# Altium PCB PCB1.PcbDoc (part 10 of 12)
Units mm, origin at the board's own origin, x right, y up, seen from the top; angles counter-clockwise.
Board outline 122.17 x 121.67 mm, 2 copper layers (Top Layer, Bottom Layer); 274 components, 225 nets, 941 pads, 421 vias.
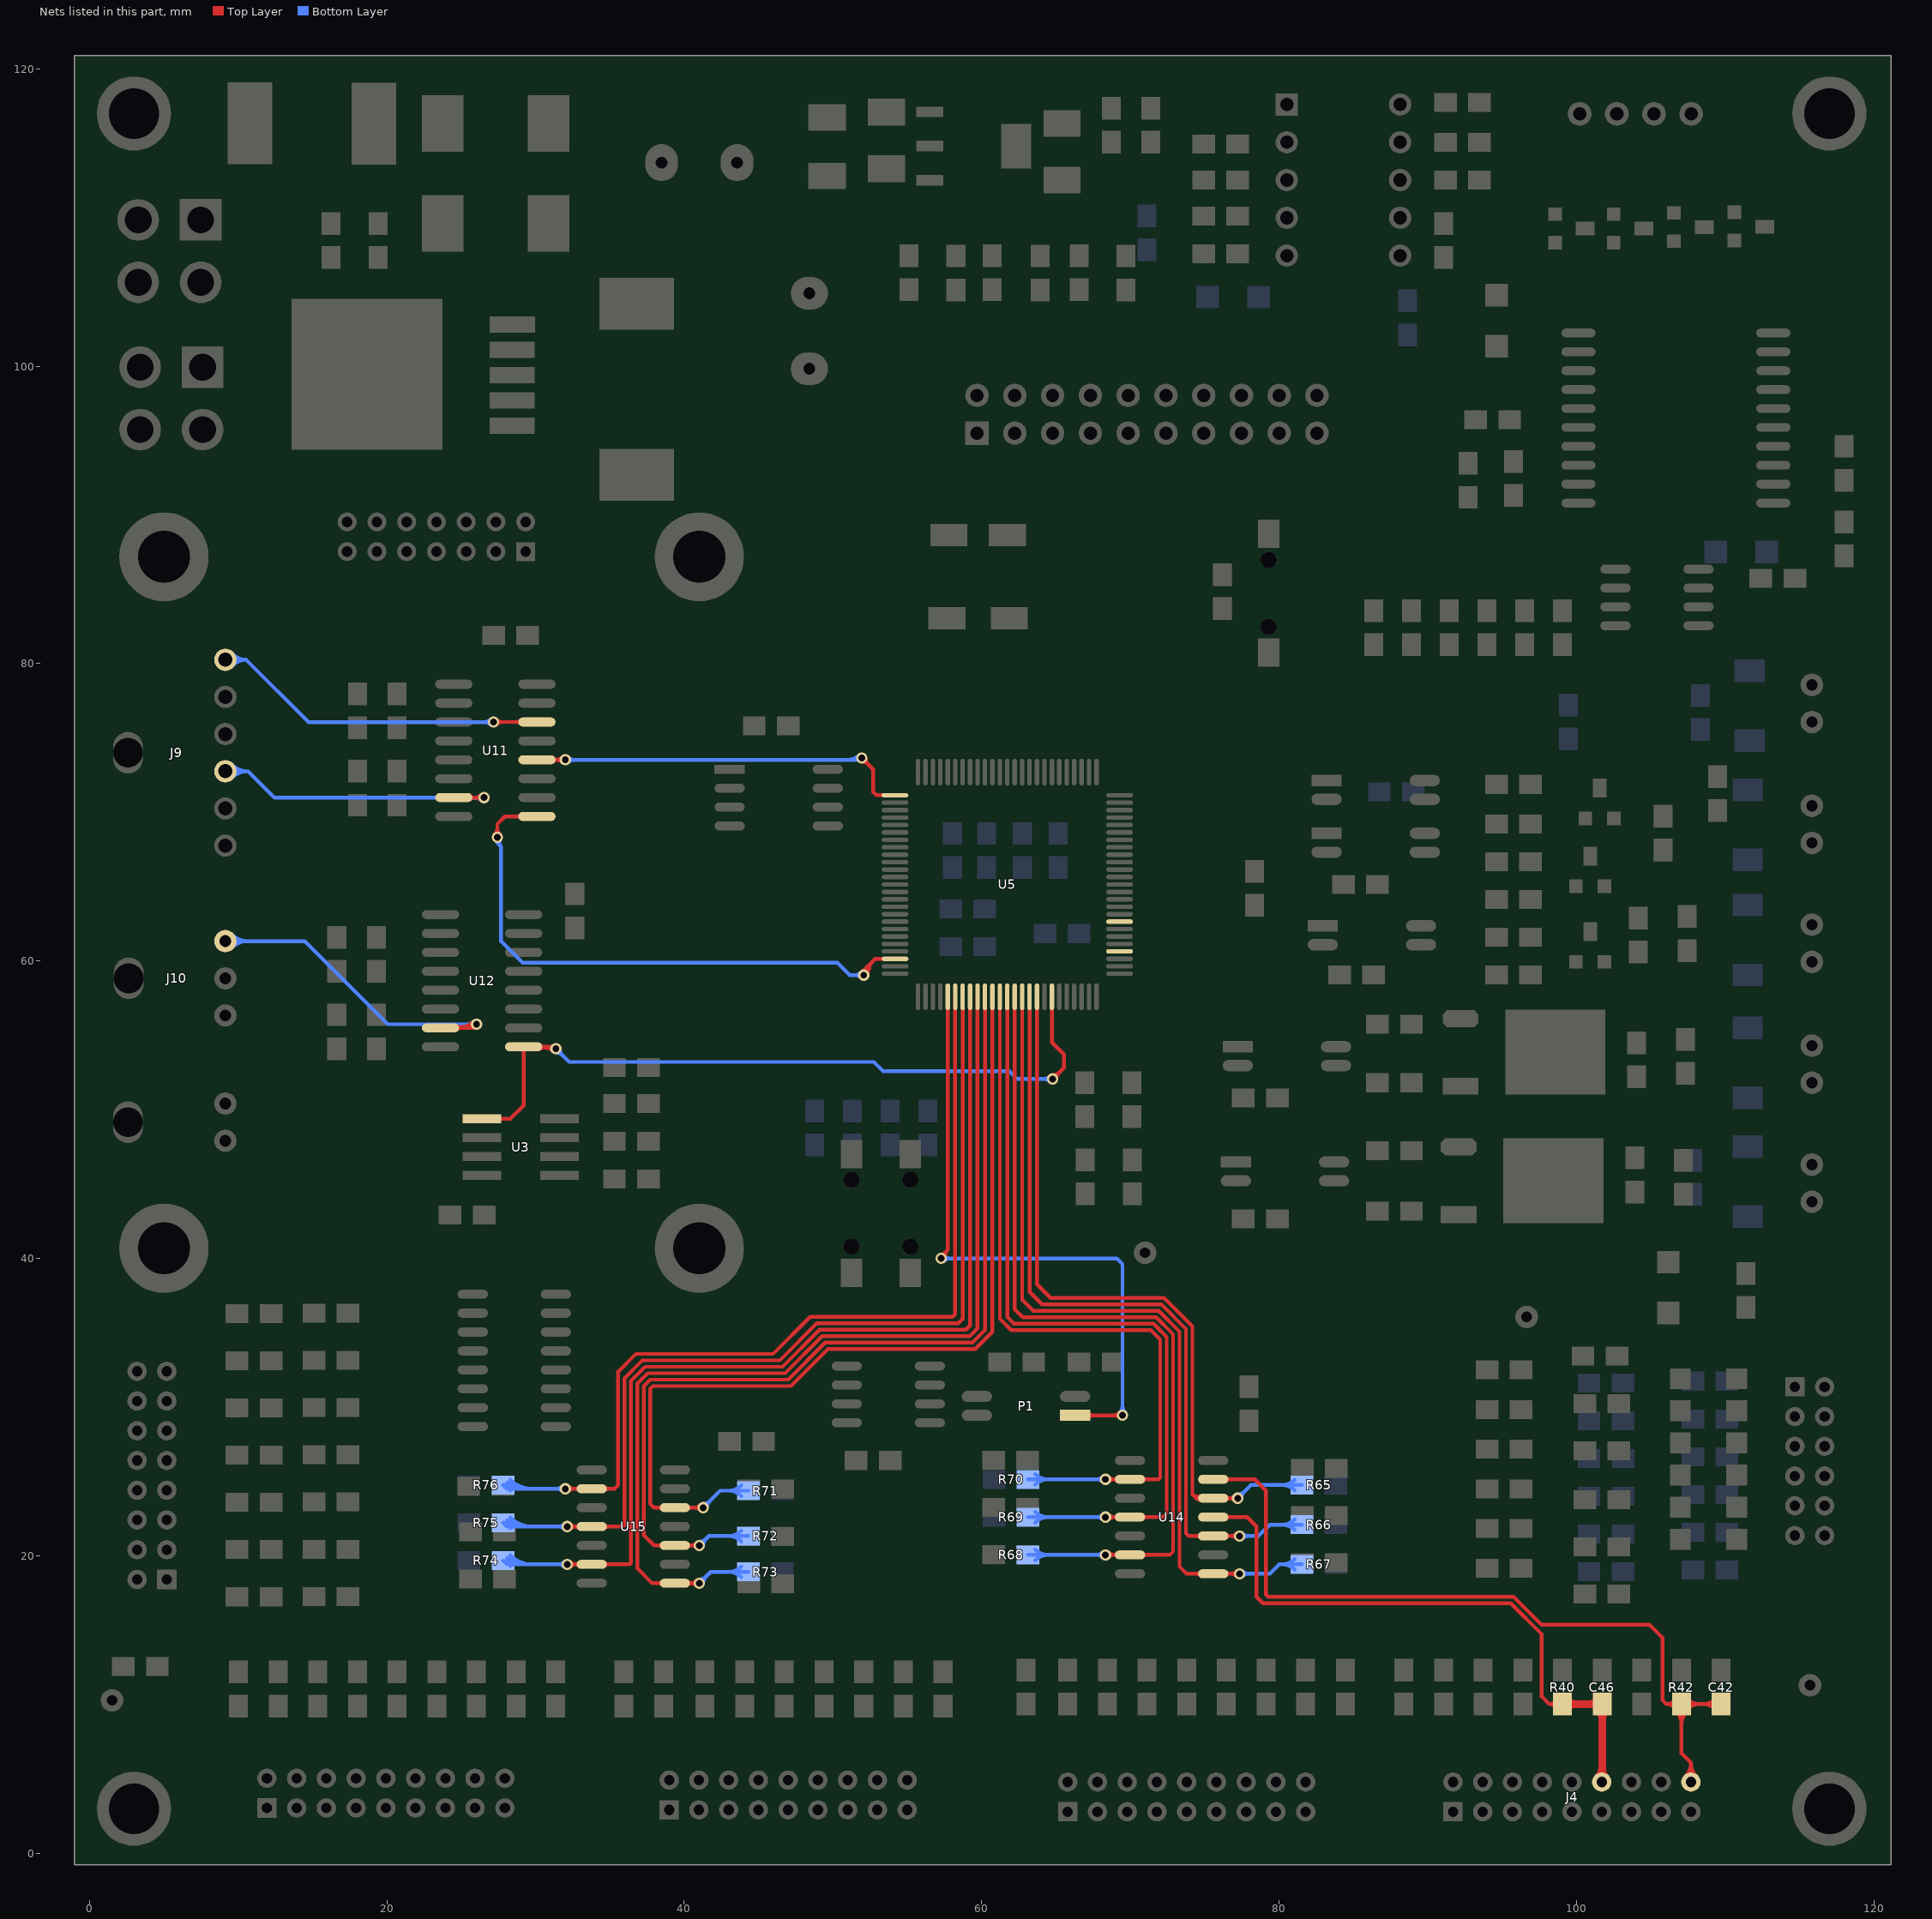
[diagram p10: the nets of this part, all layers, seen from the top]

## Via types
v1: diameter 0.762, hole 0.457, Top Layer to Bottom Layer, 339 vias
v2: diameter 1.27, hole 0.457, Top Layer to Bottom Layer, 39 vias
v3: diameter 0.889, hole 0.457, Top Layer to Bottom Layer, 21 vias
v4: diameter 1.27, hole 0.711, Top Layer to Bottom Layer, 12 vias
v5: diameter 1.524, hole 0.711, Top Layer to Bottom Layer, 5 vias
v6: diameter 1.016, hole 0.457, Top Layer to Bottom Layer, 3 vias
v7: diameter 0.711, hole 0.457, Top Layer to Bottom Layer, 1 vias
v8: diameter 1.524, hole 0.457, Top Layer to Bottom Layer, 1 vias

## Nets (pads, with @x,y where several pads share a name; then routed paths per layer and width w, separated by ;. In a path a pad name is that pad's centre, name@x,y a point inside that pad or via, vN(x,y) a via of type N, cw(c..) or ccw(c..) an arc to the next point about the centre after c; other vN are vias at no path point) (continued)
RXD1: U3.1 U5.69 U12.9 | length 62.4
  Top Layer w0.254: U3.1@26.407,49.403 28.321,49.403 29.201,50.283 U12.9@29.201,54.236 31.235,54.236 v1(31.369,54.102) ; U12.9@30.235,54.082 cw(c30.576,53.492) 30.752,54.15 ; U5.69@64.722,57.601 64.722,54.531 65.532,53.721 65.532,52.832 v1(64.77,52.07) ; 65.09,52.41 ccw(c65.205,51.981) v1(64.77,52.07) ; 65.11,52.39 cw(c64.681,52.505) v1(64.77,52.07) ; 27.824,49.403 cw(c27.824,49.821) 27.529,49.525 ccw(c27.824,49.821) 27.824,49.403 ; 27.824,49.403 ccw(c27.824,48.985) 27.529,49.281 cw(c27.824,48.985) 27.824,49.403 ; 29.201,53.807 cw(c29.63,53.807) 29.327,54.11 ccw(c29.63,53.807) 29.201,53.807 ; 29.201,53.807 ccw(c28.772,53.807) 29.076,54.11 cw(c28.772,53.807) 29.201,53.807 ; 30.576,54.236 cw(c30.576,54.665) 30.272,54.362 ccw(c30.576,54.665) 30.576,54.236 ; 30.576,54.236 ccw(c30.576,53.807) 30.272,54.11 cw(c30.576,53.807) 30.576,54.236 ; 65.204,52.504 cw(c64.77,52.937) 64.77,52.324 ccw(c64.77,52.937) 65.204,52.504 ; 65.204,52.504 ccw(c65.637,52.07) 65.024,52.07 cw(c65.637,52.07) 65.204,52.504 ; U12.9@30.432,54.236 cw(c30.432,53.165) 31.189,53.922 ccw(c30.432,53.165) U12.9@30.432,54.236
  Bottom Layer w0.254: v1@31.623,53.848 32.258,53.213 52.754,53.213 53.363,52.603 61.849,52.603 62.382,52.07 v1(64.77,52.07) ; 31.803,53.668 cw(c32.236,54.102) 31.623,54.102 ccw(c32.236,54.102) 31.803,53.668 ; 31.803,53.668 ccw(c31.369,53.235) 31.369,53.848 cw(c31.369,53.235) 31.803,53.668 ; 64.157,52.07 cw(c64.157,51.457) 64.59,51.89 ccw(c64.157,51.457) 64.157,52.07 ; 64.157,52.07 ccw(c64.157,52.683) 64.59,52.25 cw(c64.157,52.683) 64.157,52.07
RXD2: U5.26 U11.12 | length 35.8
  Top Layer w0.254: U11.12@30.095,73.537 32,73.537 v1(32.004,73.533) ; 52.263,73.32 cw(c52.378,73.749) v1(51.943,73.66) ; 52.283,73.34 ccw(c51.854,73.225) v1(51.943,73.66) ; U5.26@54.172,71.151 52.928,71.151 52.705,71.374 52.705,72.898 v1(51.943,73.66) ; 31.469,73.537 cw(c31.469,73.966) 31.166,73.662 ccw(c31.469,73.966) 31.469,73.537 ; 31.469,73.537 ccw(c31.469,73.107) 31.166,73.411 cw(c31.469,73.107) 31.469,73.537 ; 52.377,73.226 cw(c52.81,73.66) 52.197,73.66 ccw(c52.81,73.66) 52.377,73.226 ; 52.377,73.226 ccw(c51.943,72.793) 51.943,73.406 cw(c51.943,72.793) 52.377,73.226 ; 31.382,73.537 cw(c31.382,72.911) 31.824,73.353 ccw(c31.382,72.911) 31.382,73.537 ; 31.399,73.537 ccw(c31.399,74.138) 31.824,73.713 cw(c31.399,74.138) 31.399,73.537
  Bottom Layer w0.254: v1(32.004,73.533) 51.816,73.533 v1(51.943,73.66) ; 32.617,73.533 cw(c32.617,74.146) 32.184,73.713 ccw(c32.617,74.146) 32.617,73.533 ; 32.617,73.533 ccw(c32.617,72.92) 32.184,73.353 cw(c32.617,72.92) 32.617,73.533 ; 51.023,73.533 ccw(c51.023,74.58) 51.763,73.84 cw(c51.023,74.58) 51.023,73.533
RXD3: U5.48 U11.9 | length 50.7
  Top Layer w0.254: v1(27.432,68.326) 27.432,69.215 27.944,69.727 U11.9@30.095,69.727 ; v1@52.016,59.303 ccw(c51.969,59.514) 52.178,59.458 ccw(c52.387,59.402) v1@52.241,59.243 ; 52.46,59.564 cw(c51.651,59.78) v1(52.07,59.055) ; U5.48@54.172,60.151 52.832,60.151 52.07,59.389 v1(52.07,59.055) ; 27.432,68.939 cw(c26.819,68.939) 27.252,68.506 ccw(c26.819,68.939) 27.432,68.939 ; 27.432,68.939 ccw(c28.045,68.939) 27.612,68.506 cw(c28.045,68.939) 27.432,68.939 ; 28.72,69.727 cw(c28.72,69.297) 29.024,69.601 ccw(c28.72,69.297) 28.72,69.727 ; 28.72,69.727 ccw(c28.72,70.156) 29.024,69.852 cw(c28.72,70.156) 28.72,69.727 ; v1(52.07,59.055) cw(c52.876,59.055) 52.306,59.625 ccw(c52.876,59.055) v1(52.07,59.055) ; v1@52.324,59.055 cw(c53.744,59.055) 52.74,60.059 ccw(c53.744,59.055) v1@52.324,59.055
  Bottom Layer w0.254: v1(52.07,59.055) 51.13,59.055 50.292,59.893 29.134,59.893 27.686,61.341 27.686,67.691 ; v1(27.432,68.326) ccw(c27.703,68.139) 27.47,67.907 cw(c27.703,68.139) v1(27.432,68.326) ; v1(27.432,68.326) 27.432,67.945 27.686,67.691 ; 27.686,67.691 cw(c27.958,67.963) 27.641,68.182 ccw(c27.958,67.963) 27.686,67.691 ; 51.457,59.055 cw(c51.457,58.442) 51.89,58.875 ccw(c51.457,58.442) 51.457,59.055 ; 51.457,59.055 ccw(c51.457,59.668) 51.89,59.235 cw(c51.457,59.668) 51.457,59.055
RXD4: U5.79
RXD5: U5.83
RXD_M1: J10.1 U12.7 | length 38.9
  Top Layer w0.254: U12.7@23.613,55.506 25.788,55.506 v1(26.035,55.753) ; U12.7@24.647,55.66 ccw(c24.98,56.237) 25.152,55.594 ; 25.325,55.627 cw(c25.553,55.232) v1@25.863,55.567 ; 25.624,55.799 cw(c25.798,55.497) v1(26.035,55.753) ; v1@25.781,55.751 cw(c25.533,55.749) 25.657,55.535 cw(c25.781,55.321) v1@25.906,55.534 ; U12.7@24.684,55.38 cw(c24.988,55.077) 24.988,55.506 ; U12.7@24.684,55.38 cw(c24.988,55.077) 24.988,55.506 ; U12.7@24.684,55.38 cw(c24.988,55.077) 24.988,55.506 ; U12.7@24.684,55.632 ccw(c24.988,55.935) 24.988,55.506 ; U12.7@24.684,55.632 ccw(c24.988,55.935) 24.988,55.506 ; U12.7@24.684,55.632 ccw(c24.988,55.935) 24.988,55.506 ; v1(26.035,55.753) cw(c25.439,56.349) 25.439,55.506 ccw(c25.439,56.349) v1(26.035,55.753) ; U12.7@24.826,55.506 ccw(c24.826,56.962) 25.855,55.933 cw(c24.826,56.962) U12.7@24.826,55.506
  Bottom Layer w0.254: J10.1@9.144,61.341 14.478,61.341 20.066,55.753 v1(26.035,55.753) ; 10.035,61.341 cw(c10.035,62.232) 9.405,61.602 ccw(c10.035,62.232) 10.035,61.341 ; 10.035,61.341 ccw(c10.035,60.45) 9.405,61.08 cw(c10.035,60.45) 10.035,61.341 ; 10.648,61.341 cw(c10.648,62.845) 9.585,61.782 ccw(c10.648,62.845) 10.648,61.341 ; 10.648,61.341 ccw(c10.648,59.837) 9.585,60.9 cw(c10.648,59.837) 10.648,61.341 ; 25.422,55.753 cw(c25.422,55.14) 25.855,55.573 ccw(c25.422,55.14) 25.422,55.753 ; 25.422,55.753 ccw(c25.422,56.366) 25.855,55.933 cw(c25.422,56.366) 25.422,55.753
RXD_M2: J9.1 U11.14 | length 35.1
  Top Layer w0.254: v1(27.178,76.073) 27.305,76.073 27.309,76.077 U11.14@30.095,76.077 ; 28.72,76.077 cw(c28.72,75.647) U11.14@29.024,75.951 ; 28.72,76.077 ccw(c28.72,76.506) U11.14@29.024,76.202 ; 28.72,76.077 cw(c28.72,75.647) U11.14@29.024,75.951 ; 28.72,76.077 ccw(c28.72,76.506) U11.14@29.024,76.202 ; 28.72,76.077 cw(c28.72,75.647) U11.14@29.024,75.951 ; 28.72,76.077 ccw(c28.72,76.506) U11.14@29.024,76.202 ; v1@27.358,75.893 cw(c27.8,75.451) 27.8,76.077 ccw(c27.8,75.451) v1@27.358,75.893 ; v1@27.358,76.253 ccw(c27.783,76.678) 27.783,76.077 cw(c27.783,76.678) v1@27.358,76.253
  Bottom Layer w0.254: J9.1@9.271,80.264 10.541,80.264 ; v1(27.178,76.073) 14.732,76.073 10.541,80.264 ; 9.971,80.264 cw(c9.971,81.007) 9.419,80.511 ccw(c9.971,81.007) 9.971,80.264 ; 9.971,80.264 ccw(c9.971,79.521) 9.419,80.017 cw(c9.971,79.521) 9.971,80.264 ; 10.541,80.264 cw(c10.541,81.519) 9.608,80.68 ccw(c10.541,81.519) 10.541,80.264 ; 10.541,80.264 ccw(c10.541,79.009) 9.608,79.848 cw(c10.541,79.009) 10.541,80.264 ; 26.565,76.073 cw(c26.565,75.46) 26.998,75.893 ccw(c26.565,75.46) 26.565,76.073 ; 26.565,76.073 ccw(c26.565,76.686) 26.998,76.253 cw(c26.565,76.686) 26.565,76.073
RXD_M3: J9.4 U11.7 | length 33.4
  Top Layer w0.254: U11.7@24.507,70.997 26.539,70.997 v1(26.543,70.993) ; U11.7@25.578,70.871 cw(c25.881,70.567) 25.881,70.997 ; U11.7@25.578,70.871 cw(c25.881,70.567) 25.881,70.997 ; U11.7@25.578,70.871 cw(c25.881,70.567) 25.881,70.997 ; U11.7@25.578,71.122 ccw(c25.881,71.426) 25.881,70.997 ; U11.7@25.578,71.122 ccw(c25.881,71.426) 25.881,70.997 ; U11.7@25.578,71.122 ccw(c25.881,71.426) 25.881,70.997 ; 25.921,70.997 cw(c25.921,70.371) 26.363,70.813 ccw(c25.921,70.371) 25.921,70.997 ; 25.938,70.997 ccw(c25.938,71.598) 26.363,71.173 cw(c25.938,71.598) 25.938,70.997
  Bottom Layer w0.254: J9.4@9.271,72.764 10.675,72.764 12.446,70.993 v1(26.543,70.993) ; 10.035,72.764 cw(c10.035,73.655) 9.405,73.025 ccw(c10.035,73.655) 10.035,72.764 ; 10.035,72.764 ccw(c10.035,71.873) 9.405,72.503 cw(c10.035,71.873) 10.035,72.764 ; 10.648,72.764 cw(c10.648,74.268) 9.585,73.205 ccw(c10.648,74.268) 10.648,72.764 ; 10.648,72.764 ccw(c10.648,71.26) 9.585,72.323 cw(c10.648,71.26) 10.648,72.764 ; 25.93,70.993 cw(c25.93,70.38) 26.363,70.813 ccw(c25.93,70.38) 25.93,70.993 ; 25.93,70.993 ccw(c25.93,71.606) 26.363,71.173 cw(c25.93,71.606) 25.93,70.993
SENS1: R65.1 U5.67 U14.12 | length 75.6
  Top Layer w0.254: U5.67@63.722,57.601 63.722,38.259 64.643,37.338 72.268,37.338 74.168,35.438 74.168,24.13 ; v1(77.216,23.876) U14.12@75.565,23.876 74.422,23.876 74.168,24.13 ; 74.168,24.13 ccw(c74.536,24.498) U14.12@74.773,24.034 ; 74.168,24.13 ccw(c74.536,24.498) U14.12@74.773,24.034 ; 74.168,24.13 ccw(c74.536,24.498) U14.12@74.773,24.034 ; 74.168,24.13 ccw(c74.536,24.498) U14.12@74.773,24.034 ; 74.415,23.883 ccw(c74.703,24.171) U14.12@74.888,23.808 ; 74.415,23.883 ccw(c74.703,24.171) U14.12@74.888,23.808 ; 74.415,23.883 ccw(c74.703,24.171) U14.12@74.888,23.808 ; 74.415,23.883 ccw(c74.703,24.171) U14.12@74.888,23.808 ; 74.425,23.876 cw(c74.425,23.447) U14.12@74.728,23.75 ; 74.425,23.876 ccw(c74.425,24.305) U14.12@74.728,24.002 ; 74.425,23.876 cw(c74.425,23.447) U14.12@74.728,23.75 ; 74.425,23.876 ccw(c74.425,24.305) U14.12@74.728,24.002 ; 74.425,23.876 cw(c74.425,23.447) U14.12@74.728,23.75 ; 74.425,23.876 ccw(c74.425,24.305) U14.12@74.728,24.002 ; 74.425,23.876 cw(c74.425,23.447) U14.12@74.728,23.75 ; 74.425,23.876 ccw(c74.425,24.305) U14.12@74.728,24.002 ; U14.12@76.402,23.75 cw(c76.705,23.447) 76.705,23.876 ; U14.12@76.402,23.75 cw(c76.705,23.447) 76.705,23.876 ; U14.12@76.402,23.75 cw(c76.705,23.447) 76.705,23.876 ; U14.12@76.402,23.75 cw(c76.705,23.447) 76.705,23.876 ; U14.12@76.402,24.002 ccw(c76.705,24.305) 76.705,23.876 ; U14.12@76.402,24.002 ccw(c76.705,24.305) 76.705,23.876 ; U14.12@76.402,24.002 ccw(c76.705,24.305) 76.705,23.876 ; U14.12@76.402,24.002 ccw(c76.705,24.305) 76.705,23.876 ; 76.603,23.876 cw(c76.603,23.263) v1@77.036,23.696 ; 76.603,23.876 ccw(c76.603,24.489) v1@77.036,24.056 ; 76.603,23.876 cw(c76.603,23.263) v1@77.036,23.696 ; 76.603,23.876 ccw(c76.603,24.489) v1@77.036,24.056 ; 76.603,23.876 cw(c76.603,23.263) v1@77.036,23.696 ; 76.603,23.876 ccw(c76.603,24.489) v1@77.036,24.056 ; 76.603,23.876 cw(c76.603,23.263) v1@77.036,23.696 ; 76.603,23.876 ccw(c76.603,24.489) v1@77.036,24.056
  Bottom Layer w0.254: v1(77.216,23.876) 78.105,24.765 R65.1@81.534,24.765 ; v1@77.216,24.13 ccw(c77.216,24.743) 77.65,24.31 ; v1@77.216,24.13 ccw(c77.216,24.743) 77.65,24.31 ; v1@77.216,24.13 ccw(c77.216,24.743) 77.65,24.31 ; v1@77.216,24.13 ccw(c77.216,24.743) 77.65,24.31 ; v1@77.47,23.876 cw(c78.083,23.876) 77.65,24.31 ; v1@77.47,23.876 cw(c78.083,23.876) 77.65,24.31 ; v1@77.47,23.876 cw(c78.083,23.876) 77.65,24.31 ; v1@77.47,23.876 cw(c78.083,23.876) 77.65,24.31 ; 80.181,24.765 cw(c80.181,23.539) R65.1@81.048,24.406 ; 80.181,24.765 ccw(c80.181,25.991) R65.1@81.048,25.124 ; 80.181,24.765 cw(c80.181,23.539) R65.1@81.048,24.406 ; 80.181,24.765 ccw(c80.181,25.991) R65.1@81.048,25.124 ; 80.181,24.765 cw(c80.181,23.539) R65.1@81.048,24.406 ; 80.181,24.765 ccw(c80.181,25.991) R65.1@81.048,25.124 ; 80.181,24.765 cw(c80.181,23.539) R65.1@81.048,24.406 ; 80.181,24.765 ccw(c80.181,25.991) R65.1@81.048,25.124
SENS2: R66.1 U5.66 U14.10 | length 74.3
  Top Layer w0.254: U5.66@63.222,57.601 63.222,37.743 64.059,36.906 72.089,36.906 73.736,35.259 73.736,21.514 73.914,21.336 U14.10@75.565,21.336 77.216,21.336 77.343,21.463 v1(77.343,21.336) ; 74.425,21.336 cw(c74.425,20.907) U14.10@74.728,21.21 ; 74.425,21.336 ccw(c74.425,21.765) U14.10@74.728,21.462 ; 74.425,21.336 cw(c74.425,20.907) U14.10@74.728,21.21 ; 74.425,21.336 ccw(c74.425,21.765) U14.10@74.728,21.462 ; 74.425,21.336 cw(c74.425,20.907) U14.10@74.728,21.21 ; 74.425,21.336 ccw(c74.425,21.765) U14.10@74.728,21.462 ; 74.425,21.336 cw(c74.425,20.907) U14.10@74.728,21.21 ; 74.425,21.336 ccw(c74.425,21.765) U14.10@74.728,21.462 ; U14.10@76.402,21.21 cw(c76.705,20.907) 76.705,21.336 ; U14.10@76.402,21.21 cw(c76.705,20.907) 76.705,21.336 ; U14.10@76.402,21.21 cw(c76.705,20.907) 76.705,21.336 ; U14.10@76.402,21.21 cw(c76.705,20.907) 76.705,21.336 ; U14.10@76.402,21.462 ccw(c76.705,21.765) 76.705,21.336 ; U14.10@76.402,21.462 ccw(c76.705,21.765) 76.705,21.336 ; U14.10@76.402,21.462 ccw(c76.705,21.765) 76.705,21.336 ; U14.10@76.402,21.462 ccw(c76.705,21.765) 76.705,21.336 ; 76.73,21.336 cw(c76.73,20.723) v1@77.163,21.156 ; 76.73,21.336 ccw(c76.73,21.949) v1@77.163,21.516 ; 76.73,21.336 cw(c76.73,20.723) v1@77.163,21.156 ; 76.73,21.336 ccw(c76.73,21.949) v1@77.163,21.516 ; 76.73,21.336 cw(c76.73,20.723) v1@77.163,21.156 ; 76.73,21.336 ccw(c76.73,21.949) v1@77.163,21.516 ; 76.73,21.336 cw(c76.73,20.723) v1@77.163,21.156 ; 76.73,21.336 ccw(c76.73,21.949) v1@77.163,21.516
  Bottom Layer w0.254: v1(77.343,21.336) 78.613,21.336 79.375,22.098 R66.1@81.534,22.098 ; v1@77.523,21.156 cw(c77.956,20.723) 77.956,21.336 ; v1@77.523,21.156 cw(c77.956,20.723) 77.956,21.336 ; v1@77.523,21.156 cw(c77.956,20.723) 77.956,21.336 ; v1@77.523,21.156 cw(c77.956,20.723) 77.956,21.336 ; v1@77.523,21.516 ccw(c77.956,21.949) 77.956,21.336 ; v1@77.523,21.516 ccw(c77.956,21.949) 77.956,21.336 ; v1@77.523,21.516 ccw(c77.956,21.949) 77.956,21.336 ; v1@77.523,21.516 ccw(c77.956,21.949) 77.956,21.336 ; 80.181,22.098 cw(c80.181,20.872) R66.1@81.048,21.739 ; 80.181,22.098 ccw(c80.181,23.324) R66.1@81.048,22.457 ; 80.181,22.098 cw(c80.181,20.872) R66.1@81.048,21.739 ; 80.181,22.098 ccw(c80.181,23.324) R66.1@81.048,22.457 ; 80.181,22.098 cw(c80.181,20.872) R66.1@81.048,21.739 ; 80.181,22.098 ccw(c80.181,23.324) R66.1@81.048,22.457 ; 80.181,22.098 cw(c80.181,20.872) R66.1@81.048,21.739 ; 80.181,22.098 ccw(c80.181,23.324) R66.1@81.048,22.457
SENS3: R67.1 U5.65 U14.8 | length 77.1
  Top Layer w0.254: U5.65@62.722,57.601 62.722,37.227 63.475,36.474 71.911,36.474 73.304,35.081 73.304,19.279 73.787,18.796 U14.8@75.565,18.796 v1(77.343,18.796) ; 74.425,18.796 cw(c74.425,18.367) U14.8@74.728,18.67 ; 74.425,18.796 ccw(c74.425,19.225) U14.8@74.728,18.922 ; 74.425,18.796 cw(c74.425,18.367) U14.8@74.728,18.67 ; 74.425,18.796 ccw(c74.425,19.225) U14.8@74.728,18.922 ; 74.425,18.796 cw(c74.425,18.367) U14.8@74.728,18.67 ; 74.425,18.796 ccw(c74.425,19.225) U14.8@74.728,18.922 ; 74.425,18.796 cw(c74.425,18.367) U14.8@74.728,18.67 ; 74.425,18.796 ccw(c74.425,19.225) U14.8@74.728,18.922 ; U14.8@76.402,18.67 cw(c76.705,18.367) 76.705,18.796 ; U14.8@76.402,18.67 cw(c76.705,18.367) 76.705,18.796 ; U14.8@76.402,18.67 cw(c76.705,18.367) 76.705,18.796 ; U14.8@76.402,18.67 cw(c76.705,18.367) 76.705,18.796 ; U14.8@76.402,18.922 ccw(c76.705,19.225) 76.705,18.796 ; U14.8@76.402,18.922 ccw(c76.705,19.225) 76.705,18.796 ; U14.8@76.402,18.922 ccw(c76.705,19.225) 76.705,18.796 ; U14.8@76.402,18.922 ccw(c76.705,19.225) 76.705,18.796 ; 76.73,18.796 cw(c76.73,18.183) v1@77.163,18.616 ; 76.73,18.796 ccw(c76.73,19.409) v1@77.163,18.976 ; 76.73,18.796 cw(c76.73,18.183) v1@77.163,18.616 ; 76.73,18.796 ccw(c76.73,19.409) v1@77.163,18.976 ; 76.73,18.796 cw(c76.73,18.183) v1@77.163,18.616 ; 76.73,18.796 ccw(c76.73,19.409) v1@77.163,18.976 ; 76.73,18.796 cw(c76.73,18.183) v1@77.163,18.616 ; 76.73,18.796 ccw(c76.73,19.409) v1@77.163,18.976
  Bottom Layer w0.254: v1(77.343,18.796) 79.375,18.796 80.01,19.431 R67.1@81.534,19.431 ; v1@77.523,18.616 cw(c77.956,18.183) 77.956,18.796 ; v1@77.523,18.616 cw(c77.956,18.183) 77.956,18.796 ; v1@77.523,18.616 cw(c77.956,18.183) 77.956,18.796 ; v1@77.523,18.616 cw(c77.956,18.183) 77.956,18.796 ; v1@77.523,18.976 ccw(c77.956,19.409) 77.956,18.796 ; v1@77.523,18.976 ccw(c77.956,19.409) 77.956,18.796 ; v1@77.523,18.976 ccw(c77.956,19.409) 77.956,18.796 ; v1@77.523,18.976 ccw(c77.956,19.409) 77.956,18.796 ; 80.181,19.431 cw(c80.181,18.205) R67.1@81.048,19.072 ; 80.181,19.431 ccw(c80.181,20.657) R67.1@81.048,19.79 ; 80.181,19.431 cw(c80.181,18.205) R67.1@81.048,19.072 ; 80.181,19.431 ccw(c80.181,20.657) R67.1@81.048,19.79 ; 80.181,19.431 cw(c80.181,18.205) R67.1@81.048,19.072 ; 80.181,19.431 ccw(c80.181,20.657) R67.1@81.048,19.79 ; 80.181,19.431 cw(c80.181,18.205) R67.1@81.048,19.072 ; 80.181,19.431 ccw(c80.181,20.657) R67.1@81.048,19.79
SENS4: R68.1 U5.64 U14.6 | length 77.6
  Top Layer w0.254: U5.64@62.222,57.601 62.222,36.584 62.763,36.043 71.732,36.043 72.873,34.902 72.873,20.295 72.644,20.066 U14.6@69.977,20.066 v1(68.326,20.066) ; v1@68.506,19.886 cw(c68.939,19.453) 68.939,20.066 ; v1@68.506,19.886 cw(c68.939,19.453) 68.939,20.066 ; v1@68.506,19.886 cw(c68.939,19.453) 68.939,20.066 ; v1@68.506,19.886 cw(c68.939,19.453) 68.939,20.066 ; v1@68.506,20.246 ccw(c68.939,20.679) 68.939,20.066 ; v1@68.506,20.246 ccw(c68.939,20.679) 68.939,20.066 ; v1@68.506,20.246 ccw(c68.939,20.679) 68.939,20.066 ; v1@68.506,20.246 ccw(c68.939,20.679) 68.939,20.066 ; 68.837,20.066 cw(c68.837,19.637) U14.6@69.14,19.94 ; 68.837,20.066 ccw(c68.837,20.495) U14.6@69.14,20.192 ; 68.837,20.066 cw(c68.837,19.637) U14.6@69.14,19.94 ; 68.837,20.066 ccw(c68.837,20.495) U14.6@69.14,20.192 ; 68.837,20.066 cw(c68.837,19.637) U14.6@69.14,19.94 ; 68.837,20.066 ccw(c68.837,20.495) U14.6@69.14,20.192 ; 68.837,20.066 cw(c68.837,19.637) U14.6@69.14,19.94 ; 68.837,20.066 ccw(c68.837,20.495) U14.6@69.14,20.192 ; U14.6@70.814,19.94 cw(c71.117,19.637) 71.117,20.066 ; U14.6@70.814,19.94 cw(c71.117,19.637) 71.117,20.066 ; U14.6@70.814,19.94 cw(c71.117,19.637) 71.117,20.066 ; U14.6@70.814,19.94 cw(c71.117,19.637) 71.117,20.066 ; U14.6@70.814,20.192 ccw(c71.117,20.495) 71.117,20.066 ; U14.6@70.814,20.192 ccw(c71.117,20.495) 71.117,20.066 ; U14.6@70.814,20.192 ccw(c71.117,20.495) 71.117,20.066 ; U14.6@70.814,20.192 ccw(c71.117,20.495) 71.117,20.066
  Bottom Layer w0.254: R68.1@63.119,20.066 v1(68.326,20.066) ; R68.1@63.605,19.707 cw(c64.472,18.84) 64.472,20.066 ; R68.1@63.605,19.707 cw(c64.472,18.84) 64.472,20.066 ; R68.1@63.605,19.707 cw(c64.472,18.84) 64.472,20.066 ; R68.1@63.605,19.707 cw(c64.472,18.84) 64.472,20.066 ; R68.1@63.605,20.425 ccw(c64.472,21.292) 64.472,20.066 ; R68.1@63.605,20.425 ccw(c64.472,21.292) 64.472,20.066 ; R68.1@63.605,20.425 ccw(c64.472,21.292) 64.472,20.066 ; R68.1@63.605,20.425 ccw(c64.472,21.292) 64.472,20.066 ; 67.713,20.066 cw(c67.713,19.453) v1@68.146,19.886 ; 67.713,20.066 ccw(c67.713,20.679) v1@68.146,20.246 ; 67.713,20.066 cw(c67.713,19.453) v1@68.146,19.886 ; 67.713,20.066 ccw(c67.713,20.679) v1@68.146,20.246 ; 67.713,20.066 cw(c67.713,19.453) v1@68.146,19.886 ; 67.713,20.066 ccw(c67.713,20.679) v1@68.146,20.246 ; 67.713,20.066 cw(c67.713,19.453) v1@68.146,19.886 ; 67.713,20.066 ccw(c67.713,20.679) v1@68.146,20.246
SENS5: R69.1 U5.63 U14.4 | length 74.9
  Top Layer w0.254: U5.63@61.722,57.601 61.722,36.06 62.171,35.611 71.553,35.611 72.441,34.723 72.441,22.86 72.187,22.606 U14.4@69.977,22.606 v1(68.326,22.606) ; v1@68.506,22.426 cw(c68.939,21.993) 68.939,22.606 ; v1@68.506,22.426 cw(c68.939,21.993) 68.939,22.606 ; v1@68.506,22.426 cw(c68.939,21.993) 68.939,22.606 ; v1@68.506,22.426 cw(c68.939,21.993) 68.939,22.606 ; v1@68.506,22.786 ccw(c68.939,23.219) 68.939,22.606 ; v1@68.506,22.786 ccw(c68.939,23.219) 68.939,22.606 ; v1@68.506,22.786 ccw(c68.939,23.219) 68.939,22.606 ; v1@68.506,22.786 ccw(c68.939,23.219) 68.939,22.606 ; 68.837,22.606 cw(c68.837,22.177) U14.4@69.14,22.48 ; 68.837,22.606 ccw(c68.837,23.035) U14.4@69.14,22.732 ; 68.837,22.606 cw(c68.837,22.177) U14.4@69.14,22.48 ; 68.837,22.606 ccw(c68.837,23.035) U14.4@69.14,22.732 ; 68.837,22.606 cw(c68.837,22.177) U14.4@69.14,22.48 ; 68.837,22.606 ccw(c68.837,23.035) U14.4@69.14,22.732 ; 68.837,22.606 cw(c68.837,22.177) U14.4@69.14,22.48 ; 68.837,22.606 ccw(c68.837,23.035) U14.4@69.14,22.732 ; U14.4@70.814,22.48 cw(c71.117,22.177) 71.117,22.606 ; U14.4@70.814,22.48 cw(c71.117,22.177) 71.117,22.606 ; U14.4@70.814,22.48 cw(c71.117,22.177) 71.117,22.606 ; U14.4@70.814,22.48 cw(c71.117,22.177) 71.117,22.606 ; U14.4@70.814,22.732 ccw(c71.117,23.035) 71.117,22.606 ; U14.4@70.814,22.732 ccw(c71.117,23.035) 71.117,22.606 ; U14.4@70.814,22.732 ccw(c71.117,23.035) 71.117,22.606 ; U14.4@70.814,22.732 ccw(c71.117,23.035) 71.117,22.606
  Bottom Layer w0.254: R69.1@63.119,22.606 v1(68.326,22.606) ; R69.1@63.605,22.247 cw(c64.472,21.38) 64.472,22.606 ; R69.1@63.605,22.247 cw(c64.472,21.38) 64.472,22.606 ; R69.1@63.605,22.247 cw(c64.472,21.38) 64.472,22.606 ; R69.1@63.605,22.247 cw(c64.472,21.38) 64.472,22.606 ; R69.1@63.605,22.965 ccw(c64.472,23.832) 64.472,22.606 ; R69.1@63.605,22.965 ccw(c64.472,23.832) 64.472,22.606 ; R69.1@63.605,22.965 ccw(c64.472,23.832) 64.472,22.606 ; R69.1@63.605,22.965 ccw(c64.472,23.832) 64.472,22.606 ; 67.713,22.606 cw(c67.713,21.993) v1@68.146,22.426 ; 67.713,22.606 ccw(c67.713,23.219) v1@68.146,22.786 ; 67.713,22.606 cw(c67.713,21.993) v1@68.146,22.426 ; 67.713,22.606 ccw(c67.713,23.219) v1@68.146,22.786 ; 67.713,22.606 cw(c67.713,21.993) v1@68.146,22.426 ; 67.713,22.606 ccw(c67.713,23.219) v1@68.146,22.786 ; 67.713,22.606 cw(c67.713,21.993) v1@68.146,22.426 ; 67.713,22.606 ccw(c67.713,23.219) v1@68.146,22.786
SENS6: R70.1 U5.62 U14.2 | length 72
  Top Layer w0.254: U5.62@61.222,57.601 61.222,35.949 61.992,35.179 71.374,35.179 72.009,34.544 72.009,25.273 71.882,25.146 U14.2@69.977,25.146 v1(68.326,25.146) ; v1@68.506,24.966 cw(c68.939,24.533) 68.939,25.146 ; v1@68.506,24.966 cw(c68.939,24.533) 68.939,25.146 ; v1@68.506,24.966 cw(c68.939,24.533) 68.939,25.146 ; v1@68.506,24.966 cw(c68.939,24.533) 68.939,25.146 ; v1@68.506,25.326 ccw(c68.939,25.759) 68.939,25.146 ; v1@68.506,25.326 ccw(c68.939,25.759) 68.939,25.146 ; v1@68.506,25.326 ccw(c68.939,25.759) 68.939,25.146 ; v1@68.506,25.326 ccw(c68.939,25.759) 68.939,25.146 ; 68.837,25.146 cw(c68.837,24.717) U14.2@69.14,25.02 ; 68.837,25.146 ccw(c68.837,25.575) U14.2@69.14,25.272 ; 68.837,25.146 cw(c68.837,24.717) U14.2@69.14,25.02 ; 68.837,25.146 ccw(c68.837,25.575) U14.2@69.14,25.272 ; 68.837,25.146 cw(c68.837,24.717) U14.2@69.14,25.02 ; 68.837,25.146 ccw(c68.837,25.575) U14.2@69.14,25.272 ; 68.837,25.146 cw(c68.837,24.717) U14.2@69.14,25.02 ; 68.837,25.146 ccw(c68.837,25.575) U14.2@69.14,25.272 ; U14.2@70.814,25.02 cw(c71.117,24.717) 71.117,25.146 ; U14.2@70.814,25.02 cw(c71.117,24.717) 71.117,25.146 ; U14.2@70.814,25.02 cw(c71.117,24.717) 71.117,25.146 ; U14.2@70.814,25.02 cw(c71.117,24.717) 71.117,25.146 ; U14.2@70.814,25.272 ccw(c71.117,25.575) 71.117,25.146 ; U14.2@70.814,25.272 ccw(c71.117,25.575) 71.117,25.146 ; U14.2@70.814,25.272 ccw(c71.117,25.575) 71.117,25.146 ; U14.2@70.814,25.272 ccw(c71.117,25.575) 71.117,25.146
  Bottom Layer w0.254: R70.1@63.119,25.146 v1(68.326,25.146) ; R70.1@63.605,24.787 cw(c64.472,23.92) 64.472,25.146 ; R70.1@63.605,24.787 cw(c64.472,23.92) 64.472,25.146 ; R70.1@63.605,24.787 cw(c64.472,23.92) 64.472,25.146 ; R70.1@63.605,24.787 cw(c64.472,23.92) 64.472,25.146 ; R70.1@63.605,25.505 ccw(c64.472,26.372) 64.472,25.146 ; R70.1@63.605,25.505 ccw(c64.472,26.372) 64.472,25.146 ; R70.1@63.605,25.505 ccw(c64.472,26.372) 64.472,25.146 ; R70.1@63.605,25.505 ccw(c64.472,26.372) 64.472,25.146 ; 67.713,25.146 cw(c67.713,24.533) v1@68.146,24.966 ; 67.713,25.146 ccw(c67.713,25.759) v1@68.146,25.326 ; 67.713,25.146 cw(c67.713,24.533) v1@68.146,24.966 ; 67.713,25.146 ccw(c67.713,25.759) v1@68.146,25.326 ; 67.713,25.146 cw(c67.713,24.533) v1@68.146,24.966 ; 67.713,25.146 ccw(c67.713,25.759) v1@68.146,25.326 ; 67.713,25.146 cw(c67.713,24.533) v1@68.146,24.966 ; 67.713,25.146 ccw(c67.713,25.759) v1@68.146,25.326
SENS7: R71.1 U5.61 U15.12 | length 79
  Top Layer w0.254: v1(41.275,23.241) U15.12@39.37,23.241 37.973,23.241 37.719,23.495 37.719,31.242 37.897,31.42 47.168,31.42 49.657,33.909 59.563,33.909 60.722,35.068 U5.61@60.722,57.601 ; 38.23,23.241 cw(c38.23,22.812) U15.12@38.533,23.115 ; 38.23,23.241 ccw(c38.23,23.67) U15.12@38.533,23.367 ; 38.23,23.241 cw(c38.23,22.812) U15.12@38.533,23.115 ; 38.23,23.241 ccw(c38.23,23.67) U15.12@38.533,23.367 ; 38.23,23.241 cw(c38.23,22.812) U15.12@38.533,23.115 ; 38.23,23.241 ccw(c38.23,23.67) U15.12@38.533,23.367 ; 38.23,23.241 cw(c38.23,22.812) U15.12@38.533,23.115 ; 38.23,23.241 ccw(c38.23,23.67) U15.12@38.533,23.367 ; U15.12@40.207,23.115 cw(c40.51,22.812) 40.51,23.241 ; U15.12@40.207,23.115 cw(c40.51,22.812) 40.51,23.241 ; U15.12@40.207,23.115 cw(c40.51,22.812) 40.51,23.241 ; U15.12@40.207,23.115 cw(c40.51,22.812) 40.51,23.241 ; U15.12@40.207,23.367 ccw(c40.51,23.67) 40.51,23.241 ; U15.12@40.207,23.367 ccw(c40.51,23.67) 40.51,23.241 ; U15.12@40.207,23.367 ccw(c40.51,23.67) 40.51,23.241 ; U15.12@40.207,23.367 ccw(c40.51,23.67) 40.51,23.241 ; 40.662,23.241 cw(c40.662,22.628) v1@41.095,23.061 ; 40.662,23.241 ccw(c40.662,23.854) v1@41.095,23.421 ; 40.662,23.241 cw(c40.662,22.628) v1@41.095,23.061 ; 40.662,23.241 ccw(c40.662,23.854) v1@41.095,23.421 ; 40.662,23.241 cw(c40.662,22.628) v1@41.095,23.061 ; 40.662,23.241 ccw(c40.662,23.854) v1@41.095,23.421
  Bottom Layer w0.254: v1(41.275,23.241) 42.418,24.384 R71.1@44.323,24.384 ; v1@41.275,23.495 ccw(c41.275,24.108) 41.709,23.675 ; v1@41.275,23.495 ccw(c41.275,24.108) 41.709,23.675 ; v1@41.275,23.495 ccw(c41.275,24.108) 41.709,23.675 ; v1@41.529,23.241 cw(c42.142,23.241) 41.709,23.675 ; v1@41.529,23.241 cw(c42.142,23.241) 41.709,23.675 ; v1@41.529,23.241 cw(c42.142,23.241) 41.709,23.675 ; 42.97,24.384 cw(c42.97,23.158) R71.1@43.837,24.025 ; 42.97,24.384 ccw(c42.97,25.61) R71.1@43.837,24.743 ; 42.97,24.384 cw(c42.97,23.158) R71.1@43.837,24.025 ; 42.97,24.384 ccw(c42.97,25.61) R71.1@43.837,24.743 ; 42.97,24.384 cw(c42.97,23.158) R71.1@43.837,24.025 ; 42.97,24.384 ccw(c42.97,25.61) R71.1@43.837,24.743
SENS8: R72.1 U5.60 U15.10 | length 81.5
  Top Layer w0.254: v1(41.021,20.701) U15.10@39.37,20.701 37.973,20.701 37.287,21.387 37.287,31.421 37.718,31.852 46.989,31.852 49.478,34.341 59.384,34.341 60.222,35.179 U5.60@60.222,57.601 ; 38.23,20.701 cw(c38.23,20.272) U15.10@38.533,20.575 ; 38.23,20.701 ccw(c38.23,21.13) U15.10@38.533,20.827 ; 38.23,20.701 cw(c38.23,20.272) U15.10@38.533,20.575 ; 38.23,20.701 ccw(c38.23,21.13) U15.10@38.533,20.827 ; 38.23,20.701 cw(c38.23,20.272) U15.10@38.533,20.575 ; 38.23,20.701 ccw(c38.23,21.13) U15.10@38.533,20.827 ; 38.23,20.701 cw(c38.23,20.272) U15.10@38.533,20.575 ; 38.23,20.701 ccw(c38.23,21.13) U15.10@38.533,20.827 ; U15.10@40.207,20.575 cw(c40.51,20.272) 40.51,20.701 ; U15.10@40.207,20.575 cw(c40.51,20.272) 40.51,20.701 ; U15.10@40.207,20.575 cw(c40.51,20.272) 40.51,20.701 ; U15.10@40.207,20.575 cw(c40.51,20.272) 40.51,20.701 ; U15.10@40.207,20.827 ccw(c40.51,21.13) 40.51,20.701 ; U15.10@40.207,20.827 ccw(c40.51,21.13) 40.51,20.701 ; U15.10@40.207,20.827 ccw(c40.51,21.13) 40.51,20.701 ; U15.10@40.207,20.827 ccw(c40.51,21.13) 40.51,20.701 ; 40.408,20.701 cw(c40.408,20.088) v1@40.841,20.521 ; 40.408,20.701 ccw(c40.408,21.314) v1@40.841,20.881 ; 40.408,20.701 cw(c40.408,20.088) v1@40.841,20.521 ; 40.408,20.701 ccw(c40.408,21.314) v1@40.841,20.881 ; 40.408,20.701 cw(c40.408,20.088) v1@40.841,20.521 ; 40.408,20.701 ccw(c40.408,21.314) v1@40.841,20.881
  Bottom Layer w0.254: v1(41.021,20.701) 41.656,21.336 R72.1@44.323,21.336 ; v1@41.021,20.955 ccw(c41.021,21.568) 41.455,21.135 ; v1@41.021,20.955 ccw(c41.021,21.568) 41.455,21.135 ; v1@41.021,20.955 ccw(c41.021,21.568) 41.455,21.135 ; v1@41.275,20.701 cw(c41.888,20.701) 41.455,21.135 ; v1@41.275,20.701 cw(c41.888,20.701) 41.455,21.135 ; v1@41.275,20.701 cw(c41.888,20.701) 41.455,21.135 ; 42.97,21.336 cw(c42.97,20.11) R72.1@43.837,20.977 ; 42.97,21.336 ccw(c42.97,22.562) R72.1@43.837,21.695 ; 42.97,21.336 cw(c42.97,20.11) R72.1@43.837,20.977 ; 42.97,21.336 ccw(c42.97,22.562) R72.1@43.837,21.695 ; 42.97,21.336 cw(c42.97,20.11) R72.1@43.837,20.977 ; 42.97,21.336 ccw(c42.97,22.562) R72.1@43.837,21.695
SENS9: R73.1 U5.59 U15.8 | length 77.8
  Top Layer w0.254: v1(41.021,18.161) U15.8@39.37,18.161 37.846,18.161 36.855,19.152 36.855,31.6 37.539,32.283 46.787,32.283 49.276,34.773 59.205,34.773 59.722,35.289 U5.59@59.722,57.601 ; 38.23,18.161 cw(c38.23,17.732) 38.533,18.035 ccw(c38.23,17.732) 38.23,18.161 ; 38.23,18.161 ccw(c38.23,18.59) 38.533,18.287 cw(c38.23,18.59) 38.23,18.161 ; 40.408,18.161 cw(c40.408,17.548) 40.841,17.981 ccw(c40.408,17.548) 40.408,18.161 ; 40.408,18.161 ccw(c40.408,18.774) 40.841,18.341 cw(c40.408,18.774) 40.408,18.161 ; 40.51,18.161 cw(c40.51,18.59) 40.207,18.287 ccw(c40.51,18.59) 40.51,18.161 ; 40.51,18.161 ccw(c40.51,17.732) 40.207,18.035 cw(c40.51,17.732) 40.51,18.161
  Bottom Layer w0.254: v1(41.021,18.161) 41.783,18.923 R73.1@44.323,18.923 ; 41.455,18.595 cw(c41.021,19.028) 41.021,18.415 ccw(c41.021,19.028) 41.455,18.595 ; 41.455,18.595 ccw(c41.888,18.161) 41.275,18.161 cw(c41.888,18.161) 41.455,18.595 ; 42.97,18.923 cw(c42.97,17.697) 43.837,18.564 ccw(c42.97,17.697) 42.97,18.923 ; 42.97,18.923 ccw(c42.97,20.149) 43.837,19.282 cw(c42.97,20.149) 42.97,18.923
SENS10: R74.1 U5.58 U15.6 | length 97.5
  Top Layer w0.254: v1(32.131,19.431) U15.6@33.782,19.431 36.322,19.431 36.424,19.533 36.424,31.779 37.36,32.715 46.608,32.715 49.097,35.204 58.928,35.204 59.222,35.498 U5.58@59.222,57.601 ; v1@32.311,19.251 cw(c32.744,18.818) 32.744,19.431 ; v1@32.311,19.251 cw(c32.744,18.818) 32.744,19.431 ; v1@32.311,19.251 cw(c32.744,18.818) 32.744,19.431 ; v1@32.311,19.251 cw(c32.744,18.818) 32.744,19.431 ; v1@32.311,19.611 ccw(c32.744,20.044) 32.744,19.431 ; v1@32.311,19.611 ccw(c32.744,20.044) 32.744,19.431 ; v1@32.311,19.611 ccw(c32.744,20.044) 32.744,19.431 ; v1@32.311,19.611 ccw(c32.744,20.044) 32.744,19.431 ; 32.642,19.431 cw(c32.642,19.002) U15.6@32.945,19.305 ; 32.642,19.431 ccw(c32.642,19.86) U15.6@32.945,19.557 ; 32.642,19.431 cw(c32.642,19.002) U15.6@32.945,19.305 ; 32.642,19.431 ccw(c32.642,19.86) U15.6@32.945,19.557 ; 32.642,19.431 cw(c32.642,19.002) U15.6@32.945,19.305 ; 32.642,19.431 ccw(c32.642,19.86) U15.6@32.945,19.557 ; 32.642,19.431 cw(c32.642,19.002) U15.6@32.945,19.305 ; 32.642,19.431 ccw(c32.642,19.86) U15.6@32.945,19.557 ; U15.6@34.619,19.305 cw(c34.922,19.002) 34.922,19.431 ; U15.6@34.619,19.305 cw(c34.922,19.002) 34.922,19.431 ; U15.6@34.619,19.305 cw(c34.922,19.002) 34.922,19.431 ; U15.6@34.619,19.305 cw(c34.922,19.002) 34.922,19.431 ; U15.6@34.619,19.557 ccw(c34.922,19.86) 34.922,19.431 ; U15.6@34.619,19.557 ccw(c34.922,19.86) 34.922,19.431 ; U15.6@34.619,19.557 ccw(c34.922,19.86) 34.922,19.431 ; U15.6@34.619,19.557 ccw(c34.922,19.86) 34.922,19.431
  Bottom Layer w0.254: R74.1@27.813,19.685 28.067,19.431 v1(32.131,19.431) ; R74.1@27.94,19.685 ccw(c28.553,20.298) R74.1@28.553,19.431 ; R74.1@27.94,19.685 ccw(c28.553,20.298) R74.1@28.553,19.431 ; R74.1@27.94,19.685 ccw(c28.553,20.298) R74.1@28.553,19.431 ; R74.1@27.94,19.685 ccw(c28.553,20.298) R74.1@28.553,19.431 ; R74.1@28.12,19.865 ccw(c29.166,20.911) 29.166,19.431 ; R74.1@28.12,19.865 ccw(c29.166,20.911) 29.166,19.431 ; R74.1@28.12,19.865 ccw(c29.166,20.911) 29.166,19.431 ; R74.1@28.12,19.865 ccw(c29.166,20.911) 29.166,19.431 ; R74.1@28.299,19.326 cw(c28.553,19.072) R74.1@28.553,19.431 ; R74.1@28.299,19.326 cw(c28.553,19.072) R74.1@28.553,19.431 ; R74.1@28.299,19.326 cw(c28.553,19.072) R74.1@28.553,19.431 ; R74.1@28.299,19.326 cw(c28.553,19.072) R74.1@28.553,19.431 ; R74.1@28.299,20.044 ccw(c29.78,21.525) 29.78,19.431 ; R74.1@28.299,20.044 ccw(c29.78,21.525) 29.78,19.431 ; R74.1@28.299,20.044 ccw(c29.78,21.525) 29.78,19.431 ; R74.1@28.299,20.044 ccw(c29.78,21.525) 29.78,19.431 ; R74.1@28.431,19.816 ccw(c28.806,19.917) 28.612,19.58 ; R74.1@28.431,19.816 ccw(c28.806,19.917) 28.612,19.58 ; R74.1@28.431,19.816 ccw(c28.806,19.917) 28.612,19.58 ; R74.1@28.431,19.816 ccw(c28.806,19.917) 28.612,19.58 ; R74.1@28.431,19.816 ccw(c28.806,19.917) 28.612,19.58 ; R74.1@28.431,19.816 ccw(c28.806,19.917) 28.612,19.58 ; 31.518,19.431 cw(c31.518,18.818) v1@31.951,19.251 ; 31.518,19.431 ccw(c31.518,20.044) v1@31.951,19.611 ; 31.518,19.431 cw(c31.518,18.818) v1@31.951,19.251 ; 31.518,19.431 ccw(c31.518,20.044) v1@31.951,19.611 ; 31.518,19.431 cw(c31.518,18.818) v1@31.951,19.251 ; 31.518,19.431 ccw(c31.518,20.044) v1@31.951,19.611 ; 31.518,19.431 cw(c31.518,18.818) v1@31.951,19.251 ; 31.518,19.431 ccw(c31.518,20.044) v1@31.951,19.611
SENS11: R75.1 U5.57 U15.4 | length 94.3
  Top Layer w0.254: v1(32.131,21.971) U15.4@33.782,21.971 35.865,21.971 35.992,22.098 35.992,31.957 37.181,33.147 46.429,33.147 48.918,35.636 58.42,35.636 58.722,35.938 U5.57@58.722,57.601 ; v1@32.311,21.791 cw(c32.744,21.358) 32.744,21.971 ; v1@32.311,21.791 cw(c32.744,21.358) 32.744,21.971 ; v1@32.311,21.791 cw(c32.744,21.358) 32.744,21.971 ; v1@32.311,21.791 cw(c32.744,21.358) 32.744,21.971 ; v1@32.311,22.151 ccw(c32.744,22.584) 32.744,21.971 ; v1@32.311,22.151 ccw(c32.744,22.584) 32.744,21.971 ; v1@32.311,22.151 ccw(c32.744,22.584) 32.744,21.971 ; v1@32.311,22.151 ccw(c32.744,22.584) 32.744,21.971 ; 32.642,21.971 cw(c32.642,21.542) U15.4@32.945,21.845 ; 32.642,21.971 ccw(c32.642,22.4) U15.4@32.945,22.097 ; 32.642,21.971 cw(c32.642,21.542) U15.4@32.945,21.845 ; 32.642,21.971 ccw(c32.642,22.4) U15.4@32.945,22.097 ; 32.642,21.971 cw(c32.642,21.542) U15.4@32.945,21.845 ; 32.642,21.971 ccw(c32.642,22.4) U15.4@32.945,22.097 ; 32.642,21.971 cw(c32.642,21.542) U15.4@32.945,21.845 ; 32.642,21.971 ccw(c32.642,22.4) U15.4@32.945,22.097 ; U15.4@34.619,21.845 cw(c34.922,21.542) 34.922,21.971 ; U15.4@34.619,21.845 cw(c34.922,21.542) 34.922,21.971 ; U15.4@34.619,21.845 cw(c34.922,21.542) 34.922,21.971 ; U15.4@34.619,21.845 cw(c34.922,21.542) 34.922,21.971 ; U15.4@34.619,22.097 ccw(c34.922,22.4) 34.922,21.971 ; U15.4@34.619,22.097 ccw(c34.922,22.4) 34.922,21.971 ; U15.4@34.619,22.097 ccw(c34.922,22.4) 34.922,21.971 ; U15.4@34.619,22.097 ccw(c34.922,22.4) 34.922,21.971
  Bottom Layer w0.254: R75.1@27.813,22.225 28.067,21.971 v1(32.131,21.971) ; R75.1@27.94,22.225 ccw(c28.553,22.838) R75.1@28.553,21.971 ; R75.1@27.94,22.225 ccw(c28.553,22.838) R75.1@28.553,21.971 ; R75.1@27.94,22.225 ccw(c28.553,22.838) R75.1@28.553,21.971 ; R75.1@27.94,22.225 ccw(c28.553,22.838) R75.1@28.553,21.971 ; R75.1@28.12,22.405 ccw(c29.166,23.451) 29.166,21.971 ; R75.1@28.12,22.405 ccw(c29.166,23.451) 29.166,21.971 ; R75.1@28.12,22.405 ccw(c29.166,23.451) 29.166,21.971 ; R75.1@28.12,22.405 ccw(c29.166,23.451) 29.166,21.971 ; R75.1@28.299,21.866 cw(c28.553,21.612) R75.1@28.553,21.971 ; R75.1@28.299,21.866 cw(c28.553,21.612) R75.1@28.553,21.971 ; R75.1@28.299,21.866 cw(c28.553,21.612) R75.1@28.553,21.971 ; R75.1@28.299,21.866 cw(c28.553,21.612) R75.1@28.553,21.971 ; R75.1@28.299,22.584 ccw(c29.78,24.065) 29.78,21.971 ; R75.1@28.299,22.584 ccw(c29.78,24.065) 29.78,21.971 ; R75.1@28.299,22.584 ccw(c29.78,24.065) 29.78,21.971 ; R75.1@28.299,22.584 ccw(c29.78,24.065) 29.78,21.971 ; R75.1@28.431,22.356 ccw(c28.806,22.457) 28.612,22.12 ; R75.1@28.431,22.356 ccw(c28.806,22.457) 28.612,22.12 ; R75.1@28.431,22.356 ccw(c28.806,22.457) 28.612,22.12 ; R75.1@28.431,22.356 ccw(c28.806,22.457) 28.612,22.12 ; R75.1@28.431,22.356 ccw(c28.806,22.457) 28.612,22.12 ; R75.1@28.431,22.356 ccw(c28.806,22.457) 28.612,22.12 ; 31.518,21.971 cw(c31.518,21.358) v1@31.951,21.791 ; 31.518,21.971 ccw(c31.518,22.584) v1@31.951,22.151 ; 31.518,21.971 cw(c31.518,21.358) v1@31.951,21.791 ; 31.518,21.971 ccw(c31.518,22.584) v1@31.951,22.151 ; 31.518,21.971 cw(c31.518,21.358) v1@31.951,21.791 ; 31.518,21.971 ccw(c31.518,22.584) v1@31.951,22.151 ; 31.518,21.971 cw(c31.518,21.358) v1@31.951,21.791 ; 31.518,21.971 ccw(c31.518,22.584) v1@31.951,22.151
SENS12: R76.1 U5.56 U15.2 | length 91.2
  Top Layer w0.254: v1(32.004,24.511) U15.2@33.782,24.511 35.306,24.511 35.56,24.765 35.56,32.385 36.754,33.579 45.974,33.579 48.463,36.068 58.039,36.068 58.222,36.251 U5.56@58.222,57.601 ; v1@32.184,24.331 cw(c32.617,23.898) 32.617,24.511 ; v1@32.184,24.331 cw(c32.617,23.898) 32.617,24.511 ; v1@32.184,24.331 cw(c32.617,23.898) 32.617,24.511 ; v1@32.184,24.331 cw(c32.617,23.898) 32.617,24.511 ; v1@32.184,24.691 ccw(c32.617,25.124) 32.617,24.511 ; v1@32.184,24.691 ccw(c32.617,25.124) 32.617,24.511 ; v1@32.184,24.691 ccw(c32.617,25.124) 32.617,24.511 ; v1@32.184,24.691 ccw(c32.617,25.124) 32.617,24.511 ; 32.642,24.511 cw(c32.642,24.082) U15.2@32.945,24.385 ; 32.642,24.511 ccw(c32.642,24.94) U15.2@32.945,24.637 ; 32.642,24.511 cw(c32.642,24.082) U15.2@32.945,24.385 ; 32.642,24.511 ccw(c32.642,24.94) U15.2@32.945,24.637 ; 32.642,24.511 cw(c32.642,24.082) U15.2@32.945,24.385 ; 32.642,24.511 ccw(c32.642,24.94) U15.2@32.945,24.637 ; 32.642,24.511 cw(c32.642,24.082) U15.2@32.945,24.385 ; 32.642,24.511 ccw(c32.642,24.94) U15.2@32.945,24.637 ; U15.2@34.619,24.385 cw(c34.922,24.082) 34.922,24.511 ; U15.2@34.619,24.385 cw(c34.922,24.082) 34.922,24.511 ; U15.2@34.619,24.385 cw(c34.922,24.082) 34.922,24.511 ; U15.2@34.619,24.385 cw(c34.922,24.082) 34.922,24.511 ; U15.2@34.619,24.637 ccw(c34.922,24.94) 34.922,24.511 ; U15.2@34.619,24.637 ccw(c34.922,24.94) 34.922,24.511 ; U15.2@34.619,24.637 ccw(c34.922,24.94) 34.922,24.511 ; U15.2@34.619,24.637 ccw(c34.922,24.94) 34.922,24.511
  Bottom Layer w0.254: R76.1@27.813,24.765 28.067,24.511 v1(32.004,24.511) ; R76.1@27.94,24.765 ccw(c28.553,25.378) R76.1@28.553,24.511 ; R76.1@27.94,24.765 ccw(c28.553,25.378) R76.1@28.553,24.511 ; R76.1@27.94,24.765 ccw(c28.553,25.378) R76.1@28.553,24.511 ; R76.1@27.94,24.765 ccw(c28.553,25.378) R76.1@28.553,24.511 ; R76.1@28.12,24.945 ccw(c29.166,25.991) 29.166,24.511 ; R76.1@28.12,24.945 ccw(c29.166,25.991) 29.166,24.511 ; R76.1@28.12,24.945 ccw(c29.166,25.991) 29.166,24.511 ; R76.1@28.12,24.945 ccw(c29.166,25.991) 29.166,24.511 ; R76.1@28.299,24.406 cw(c28.553,24.152) R76.1@28.553,24.511 ; R76.1@28.299,24.406 cw(c28.553,24.152) R76.1@28.553,24.511 ; R76.1@28.299,24.406 cw(c28.553,24.152) R76.1@28.553,24.511 ; R76.1@28.299,24.406 cw(c28.553,24.152) R76.1@28.553,24.511 ; R76.1@28.299,25.124 ccw(c29.78,26.605) 29.78,24.511 ; R76.1@28.299,25.124 ccw(c29.78,26.605) 29.78,24.511 ; R76.1@28.299,25.124 ccw(c29.78,26.605) 29.78,24.511 ; R76.1@28.299,25.124 ccw(c29.78,26.605) 29.78,24.511 ; R76.1@28.431,24.896 ccw(c28.806,24.997) 28.612,24.66 ; R76.1@28.431,24.896 ccw(c28.806,24.997) 28.612,24.66 ; R76.1@28.431,24.896 ccw(c28.806,24.997) 28.612,24.66 ; R76.1@28.431,24.896 ccw(c28.806,24.997) 28.612,24.66 ; R76.1@28.431,24.896 ccw(c28.806,24.997) 28.612,24.66 ; R76.1@28.431,24.896 ccw(c28.806,24.997) 28.612,24.66 ; 31.391,24.511 cw(c31.391,23.898) v1@31.824,24.331 ; 31.391,24.511 ccw(c31.391,25.124) v1@31.824,24.691 ; 31.391,24.511 cw(c31.391,23.898) v1@31.824,24.331 ; 31.391,24.511 ccw(c31.391,25.124) v1@31.824,24.691 ; 31.391,24.511 cw(c31.391,23.898) v1@31.824,24.331 ; 31.391,24.511 ccw(c31.391,25.124) v1@31.824,24.691 ; 31.391,24.511 cw(c31.391,23.898) v1@31.824,24.331 ; 31.391,24.511 ccw(c31.391,25.124) v1@31.824,24.691
SENS_POWER: P1.1 U5.55 | length 57.6
  Top Layer w0.254: v1@57.15,40.005 v1(57.277,40.005) ; v1@57.213,40.069 57.722,40.577 ; U5.55@57.722,57.601 57.722,40.577 ; P1.1@66.286,29.453 69.458,29.453 v1(69.469,29.464) ; v1@57.277,40.259 ccw(c57.277,40.566) 57.494,40.349 ; v1@57.277,40.259 ccw(c57.277,40.566) 57.494,40.349 ; v1@57.277,40.259 ccw(c57.277,40.566) 57.494,40.349 ; v1@57.53,40.032 cw(c58.196,40.103) 57.722,40.577 ; v1@57.53,40.032 cw(c58.196,40.103) 57.722,40.577 ; v1@57.53,40.032 cw(c58.196,40.103) 57.722,40.577 ; P1.1@67.101,29.274 cw(c67.534,28.84) 67.534,29.453 ; P1.1@67.101,29.274 cw(c67.534,28.84) 67.534,29.453 ; P1.1@67.101,29.274 cw(c67.534,28.84) 67.534,29.453 ; P1.1@67.101,29.633 ccw(c67.534,30.066) 67.534,29.453 ; P1.1@67.101,29.633 ccw(c67.534,30.066) 67.534,29.453 ; P1.1@67.101,29.633 ccw(c67.534,30.066) 67.534,29.453 ; 68.83,29.453 ccw(c68.83,30.103) v1@69.289,29.644 ; 68.83,29.453 ccw(c68.83,30.103) v1@69.289,29.644 ; 68.83,29.453 ccw(c68.83,30.103) v1@69.289,29.644 ; 68.882,29.453 cw(c68.882,28.877) v1@69.289,29.284 ; 68.882,29.453 cw(c68.882,28.877) v1@69.289,29.284 ; 68.882,29.453 cw(c68.882,28.877) v1@69.289,29.284
  Bottom Layer w0.254: v1(57.277,40.005) 69.088,40.005 69.469,39.624 v1(69.469,29.464) ; v1@57.457,39.825 cw(c57.89,39.392) 57.89,40.005 ; v1@57.457,39.825 cw(c57.89,39.392) 57.89,40.005 ; v1@57.457,39.825 cw(c57.89,39.392) 57.89,40.005 ; v1@57.457,40.185 ccw(c57.89,40.618) 57.89,40.005 ; v1@57.457,40.185 ccw(c57.89,40.618) 57.89,40.005 ; v1@57.457,40.185 ccw(c57.89,40.618) 57.89,40.005 ; v1@69.289,29.644 ccw(c68.856,30.077) 69.469,30.077 ; v1@69.289,29.644 ccw(c68.856,30.077) 69.469,30.077 ; v1@69.289,29.644 ccw(c68.856,30.077) 69.469,30.077 ; 69.469,30.077 ccw(c70.082,30.077) v1@69.649,29.644 ; 69.469,30.077 ccw(c70.082,30.077) v1@69.649,29.644 ; 69.469,30.077 ccw(c70.082,30.077) v1@69.649,29.644
SENSER1: C42.1 J4.18 R42.2 U14.13 | length 89.9
  Top Layer w0.254: U14.13@75.565,25.146 78.359,25.146 79.121,24.384 79.121,17.399 79.273,17.247 95.759,17.247 97.639,15.367 104.902,15.367 105.791,14.478 105.791,10.287 106.045,10.033 ; J4.18@107.694,4.794 107.694,6.098 107.061,6.731 R42.2@107.061,10.033 ; C42.1@109.728,10.033 R42.2@107.061,10.033 ; U14.13@76.402,25.02 cw(c76.705,24.717) 76.705,25.146 ; U14.13@76.402,25.02 cw(c76.705,24.717) 76.705,25.146 ; U14.13@76.402,25.02 cw(c76.705,24.717) 76.705,25.146 ; U14.13@76.402,25.02 cw(c76.705,24.717) 76.705,25.146 ; U14.13@76.402,25.272 ccw(c76.705,25.575) 76.705,25.146 ; U14.13@76.402,25.272 ccw(c76.705,25.575) 76.705,25.146 ; U14.13@76.402,25.272 ccw(c76.705,25.575) 76.705,25.146 ; U14.13@76.402,25.272 ccw(c76.705,25.575) 76.705,25.146 ; 106.045,10.033 cw(c106.045,9.271) R42.2@106.655,9.728 ; 106.045,10.033 ccw(c106.045,10.795) R42.2@106.655,10.338 ; 106.045,10.033 cw(c106.045,9.271) R42.2@106.655,9.728 ; 106.045,10.033 ccw(c106.045,10.795) R42.2@106.655,10.338 ; 106.045,10.033 cw(c106.045,9.271) R42.2@106.655,9.728 ; 106.045,10.033 ccw(c106.045,10.795) R42.2@106.655,10.338 ; 106.045,10.033 cw(c106.045,9.271) R42.2@106.655,9.728 ; 106.045,10.033 ccw(c106.045,10.795) R42.2@106.655,10.338 ; 106.045,10.033 R42.2@107.061,10.033 ; R42.2@106.702,9.547 cw(c105.835,8.68) 107.061,8.68 ; R42.2@106.702,9.547 cw(c105.835,8.68) 107.061,8.68 ; R42.2@106.702,9.547 cw(c105.835,8.68) 107.061,8.68 ; R42.2@106.702,9.547 cw(c105.835,8.68) 107.061,8.68 ; 107.061,8.68 cw(c108.287,8.68) R42.2@107.42,9.547 ; 107.061,8.68 cw(c108.287,8.68) R42.2@107.42,9.547 ; 107.061,8.68 cw(c108.287,8.68) R42.2@107.42,9.547 ; 107.061,8.68 cw(c108.287,8.68) R42.2@107.42,9.547 ; J4.18@107.324,5.164 ccw(c106.431,6.057) 107.694,6.057 ; J4.18@107.324,5.164 ccw(c106.431,6.057) 107.694,6.057 ; J4.18@107.324,5.164 ccw(c106.431,6.057) 107.694,6.057 ; R42.2@107.42,9.674 cw(c108.287,8.807) 108.287,10.033 ; R42.2@107.42,9.674 cw(c108.287,8.807) 108.287,10.033 ; R42.2@107.42,9.674 cw(c108.287,8.807) 108.287,10.033 ; R42.2@107.42,9.674 cw(c108.287,8.807) 108.287,10.033 ; R42.2@107.42,10.392 ccw(c108.287,11.259) 108.287,10.033 ; R42.2@107.42,10.392 ccw(c108.287,11.259) 108.287,10.033 ; R42.2@107.42,10.392 ccw(c108.287,11.259) 108.287,10.033 ; R42.2@107.42,10.392 ccw(c108.287,11.259) 108.287,10.033 ; 107.694,6.057 ccw(c108.957,6.057) J4.18@108.064,5.164 ; 107.694,6.057 ccw(c108.957,6.057) J4.18@108.064,5.164 ; 107.694,6.057 ccw(c108.957,6.057) J4.18@108.064,5.164 ; 108.502,10.033 cw(c108.502,8.807) C42.1@109.369,9.674 ; 108.502,10.033 ccw(c108.502,11.259) C42.1@109.369,10.392 ; 108.502,10.033 cw(c108.502,8.807) C42.1@109.369,9.674 ; 108.502,10.033 ccw(c108.502,11.259) C42.1@109.369,10.392 ; 108.502,10.033 cw(c108.502,8.807) C42.1@109.369,9.674 ; 108.502,10.033 ccw(c108.502,11.259) C42.1@109.369,10.392 ; 108.502,10.033 cw(c108.502,8.807) C42.1@109.369,9.674 ; 108.502,10.033 ccw(c108.502,11.259) C42.1@109.369,10.392
SENSER2: C46.1 J4.12 R40.2 U14.11 | length 68.1
  Top Layer w0.254: U14.11@75.565,22.606 77.851,22.606 78.486,21.971 78.486,17.247 78.918,16.815 95.58,16.815 97.663,14.732 97.663,10.541 98.171,10.033 ; R40.2@99.06,10.033 98.171,10.033 ; U14.11@76.402,22.48 cw(c76.705,22.177) 76.705,22.606 ; U14.11@76.402,22.48 cw(c76.705,22.177) 76.705,22.606 ; U14.11@76.402,22.48 cw(c76.705,22.177) 76.705,22.606 ; U14.11@76.402,22.48 cw(c76.705,22.177) 76.705,22.606 ; U14.11@76.402,22.732 ccw(c76.705,23.035) 76.705,22.606 ; U14.11@76.402,22.732 ccw(c76.705,23.035) 76.705,22.606 ; U14.11@76.402,22.732 ccw(c76.705,23.035) 76.705,22.606 ; U14.11@76.402,22.732 ccw(c76.705,23.035) 76.705,22.606 ; 98.171,10.033 cw(c98.171,9.509) R40.2@98.622,9.775 ; 98.171,10.033 ccw(c98.171,10.557) R40.2@98.622,10.291 ; 98.171,10.033 cw(c98.171,9.509) R40.2@98.622,9.775 ; 98.171,10.033 ccw(c98.171,10.557) R40.2@98.622,10.291 ; 98.171,10.033 cw(c98.171,9.509) R40.2@98.622,9.775 ; 98.171,10.033 ccw(c98.171,10.557) R40.2@98.622,10.291 ; 98.171,10.033 cw(c98.171,9.509) R40.2@98.622,9.775 ; 98.171,10.033 ccw(c98.171,10.557) R40.2@98.622,10.291
  Top Layer w0.508: R40.2@99.06,10.033 C46.1@101.727,10.033 J4.12@101.727,4.572 ; R40.2@99.329,9.764 cw(c99.98,9.113) 99.98,10.033 ; R40.2@99.329,9.764 cw(c99.98,9.113) 99.98,10.033 ; R40.2@99.329,9.764 cw(c99.98,9.113) 99.98,10.033 ; R40.2@99.329,9.764 cw(c99.98,9.113) 99.98,10.033 ; R40.2@99.329,10.302 ccw(c99.98,10.953) 99.98,10.033 ; R40.2@99.329,10.302 ccw(c99.98,10.953) 99.98,10.033 ; R40.2@99.329,10.302 ccw(c99.98,10.953) 99.98,10.033 ; R40.2@99.329,10.302 ccw(c99.98,10.953) 99.98,10.033 ; 100.807,10.033 cw(c100.807,9.113) C46.1@101.458,9.764 ; 100.807,10.033 ccw(c100.807,10.953) C46.1@101.458,10.302 ; 100.807,10.033 cw(c100.807,9.113) C46.1@101.458,9.764 ; 100.807,10.033 ccw(c100.807,10.953) C46.1@101.458,10.302 ; 100.807,10.033 cw(c100.807,9.113) C46.1@101.458,9.764 ; 100.807,10.033 ccw(c100.807,10.953) C46.1@101.458,10.302 ; J4.12@101.414,5.074 ccw(c100.658,5.83) 101.727,5.83 ; J4.12@101.414,5.074 ccw(c100.658,5.83) 101.727,5.83 ; J4.12@101.414,5.074 ccw(c100.658,5.83) 101.727,5.83 ; C46.1@101.458,9.637 cw(c100.807,8.986) 101.727,8.986 ; C46.1@101.458,9.637 cw(c100.807,8.986) 101.727,8.986 ; C46.1@101.458,9.637 cw(c100.807,8.986) 101.727,8.986 ; 101.727,5.67 ccw(c102.57,5.67) J4.12@101.974,5.074 ; 101.727,5.67 ccw(c102.57,5.67) J4.12@101.974,5.074 ; 101.727,5.67 ccw(c102.57,5.67) J4.12@101.974,5.074 ; 101.727,8.986 cw(c102.647,8.986) C46.1@101.996,9.637 ; 101.727,8.986 cw(c102.647,8.986) C46.1@101.996,9.637 ; 101.727,8.986 cw(c102.647,8.986) C46.1@101.996,9.637